# Altium PCB LCD_1.47_172_320_TOP_2022-03-14.pcbdoc
Units mm, origin at the board's own origin, x right, y up, seen from the top; angles counter-clockwise.
Board outline 49.16 x 69.14 mm, 2 copper layers (Top Layer, Bottom Layer); 1 components, 0 nets, 12 pads, 0 vias.
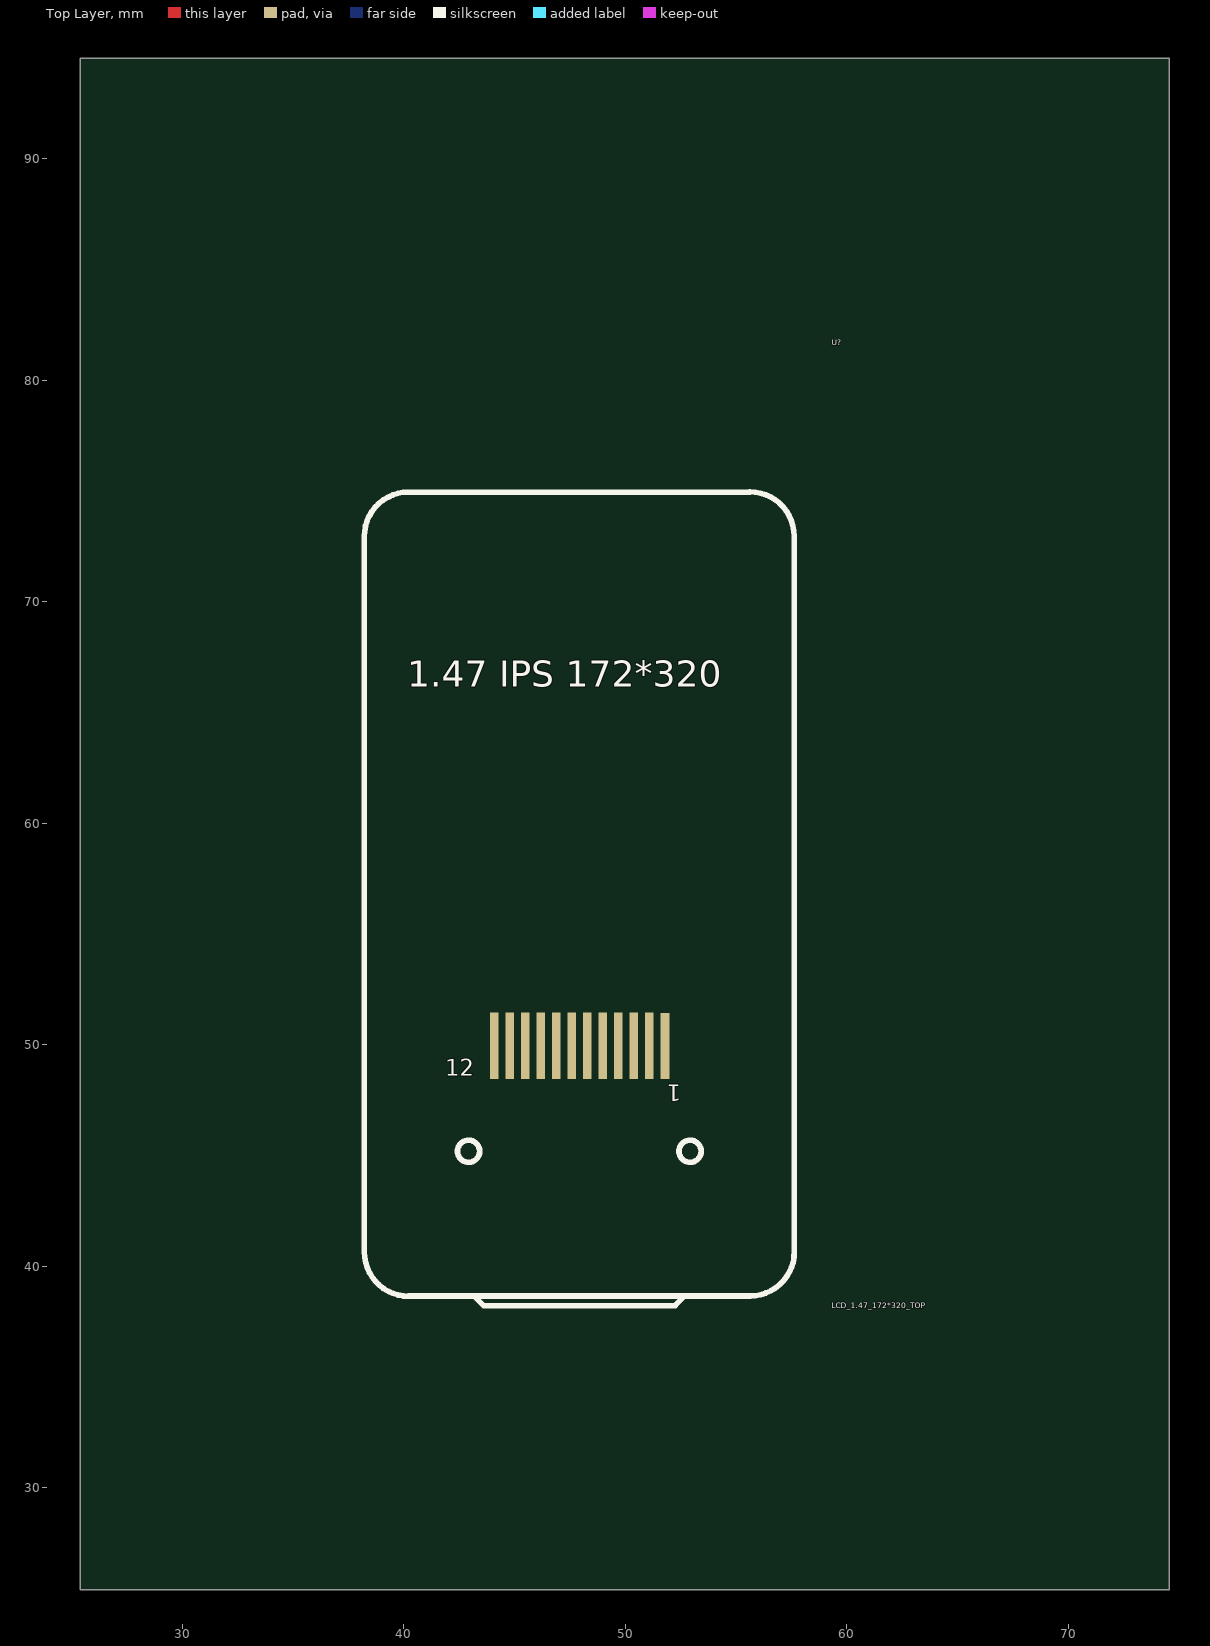
[diagram p0: Top Layer view]
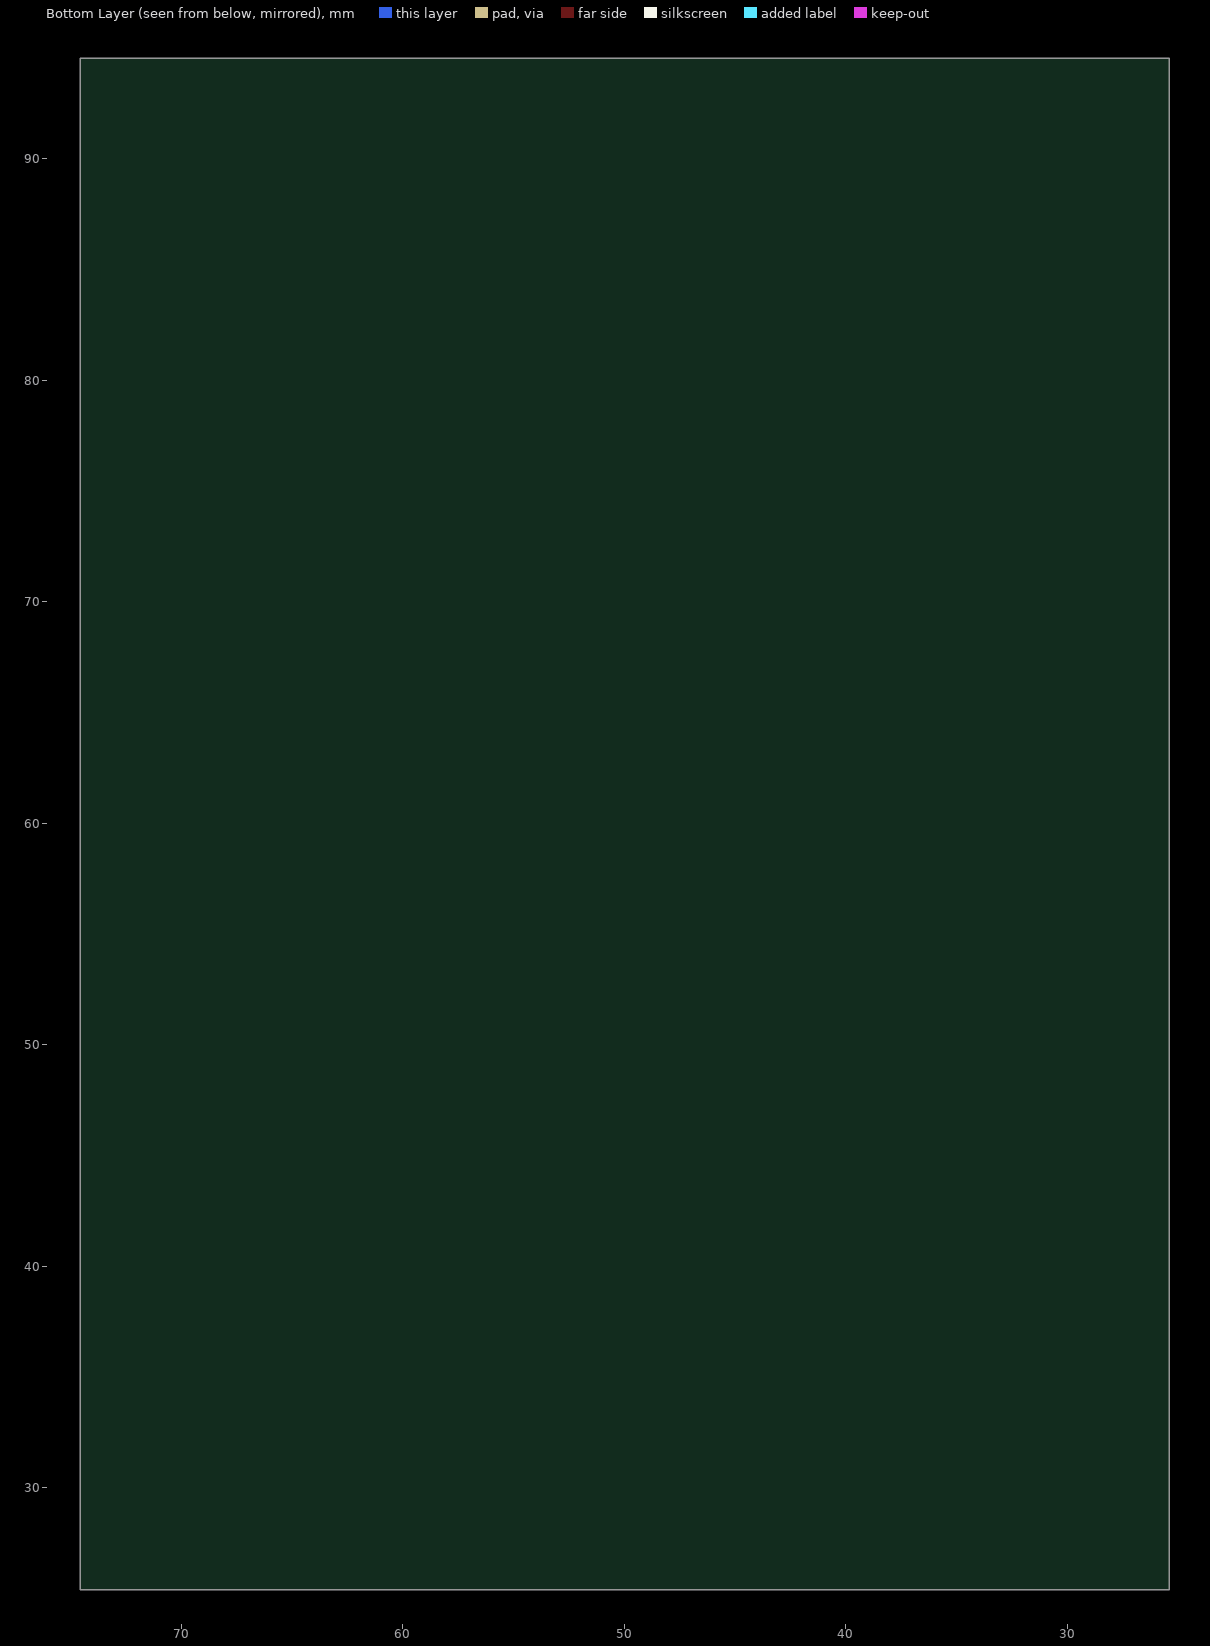
[diagram p1: Bottom Layer view, seen from below]

## Layer stack, top to bottom
Top Layer: signal copper (thickness not stored)
Dielectric: dielectric 0.32, FR-4, Dk 4.8
Bottom Layer: signal copper (thickness not stored)

## Board outline
74.559,25.4 25.4,25.4 25.4,94.544 74.559,94.544

## Components (designator, comment, footprint, x,y, rotation, side; value= is the part's Value field where it differs from the comment)
U? "LCD_1.47_172*320_TOP" LCD_1.47_172*320_TOP 48.71,59.845 r0 top

## Footprints (in the part's own frame and the unit in brackets; to place one, negate y for a bottom-side part, rotate by r counter-clockwise, add the part's x,y. Pads: shape width x height; smd on the part's side, far side on the other; paste and mask are expansions set on the pad)
LCD_1.47_172*320_TOP [mm]
  rect 0.4x3 smd: 1(3.086,-9.895) 2(2.379,-9.883) 3(1.679,-9.883) 4(0.979,-9.883) 5(0.279,-9.883) 6(-0.421,-9.883) 7(-1.121,-9.883) 8(-1.821,-9.883) 9(-2.521,-9.883) 10(-3.221,-9.883) 11(-3.921,-9.883) 12(-4.621,-9.883)
  silkscreen extent -10.49,-21.62 8.93,15.12

## Nets (pads, with @x,y where several pads share a name; then routed paths per layer and width w, separated by ;. In a path a pad name is that pad's centre, name@x,y a point inside that pad or via, vN(x,y) a via of type N, cw(c..) or ccw(c..) an arc to the next point about the centre after c; other vN are vias at no path point)
pads on no net: U?.1 U?.2 U?.3 U?.4 U?.5 U?.6 U?.7 U?.8 U?.9 U?.10 U?.11 U?.12

## Text inside footprints (layer, text, board x,y; h text height)
U?: Top Overlay "1" at 52.528,48.444 h1.27 r180; Top Overlay "12" at 41.886,48.368 h1.27; Top Overlay "1.47 IPS 172*320" at 40.165,65.761 h2.03